# EAGLE board SparkFun_TMC6300_Breakout-TopJig (EAGLE 9.6.2)

Size 27.96 x 33.02 mm. Coordinates in mm from the lower left corner, seen from the top.
Outline: 5.86,25.4 arc-180 7.64,27.18 20.34,27.18 arc-180 22.12,25.4 22.12,22.61 25.29,22.61 25.29,8.38 22.12,8.38 22.12,7.62 arc-180 20.34,5.84 7.64,5.84 arc-180 5.86,7.62 5.86,10.16 arc100 3.32,12.7 2.56,12.7 arc80 0.02,8.89 0.02,2.54 arc80 2.56,0 25.42,0 arc80 27.96,2.54 27.96,30.48 arc80 25.42,33.02 2.56,33.02 arc80 0.02,30.48 0.02,22.86 arc80 2.56,20.32 3.32,20.32 arc100 5.86,22.86 5.86,25.4
Copper layers (1*16): Top 0.035mm / dielectric 1.5mm / Bottom 0.035mm
Design rules "SparkFun-2-Layer-General-JLCPCB": minimum track width 7mil, minimum drill 0.3mm, track to track 7mil, track to pad 7mil, pad to pad 7mil, via to via 7mil, smd to smd 7mil, copper to edge 7mil, drill to drill 7mil, minimum pad ring 7mil, minimum via ring 7mil, stop-mask expansion 3mil, vias tented up to drill 25mil, thermal gap 10mil

## Footprints (pad centres in the part's own frame; a part is rotated, then mirrored left to right if it is on the bottom)
STAND-OFF-TIGHT = hole 3.048: 0,0
NUBBIN_LOCKER = hole 2.794: 0,0

## Placement (x,y rotation side)
E$1  [STAND-OFF-TIGHT]  3.2,6.35 0 top
E$2  [STAND-OFF-TIGHT]  3.2,26.67 0 top
E$3  [STAND-OFF-TIGHT]  24.79,6.35 0 top
E$4  [STAND-OFF-TIGHT]  24.79,26.67 0 top
E$5  [NUBBIN_LOCKER]  13.99,2.03 0 top
E$6  [NUBBIN_LOCKER]  13.99,30.99 0 top
FRAME1  FRAME-LETTER  [CREATIVE_COMMONS]  33.04,-5.08 0 bottom  (outside the outline)
LOGO1  OSHW-LOGONO_SILK  [DUMMY]  19.07,3.81 0 top
LOGO2  SPECIAL_INSTRUCTIONS-ORDERING  [ORDERING_INSTRUCTIONS]  2.56,57.15 0 bottom  (outside the outline)

## Library data of the parts
E$1-E$6 = SparkFun-Hardware
FRAME1 = SparkFun-Aesthetics; DESIGNER: Ricardo Ramos
LOGO1 LOGO2 = SparkFun-Aesthetics

## Text on the board
Top: Up-TopLayer
Bottom: Down-TopLayer
tPlace: #X1 | TMC6300 | SPX-21220
Measures: Dimensions in inches
bDocu: Board thickness is 1.6mm | 4 Layer Board | N. Seidle